# Altium PCB main.PcbDoc
Units mm, origin at the board's own origin, x right, y up, seen from the top; angles counter-clockwise.
Board outline 27 x 41 mm, 2 copper layers (Top Layer, Bottom Layer); 11 components, 13 nets, 65 pads, 445 vias.
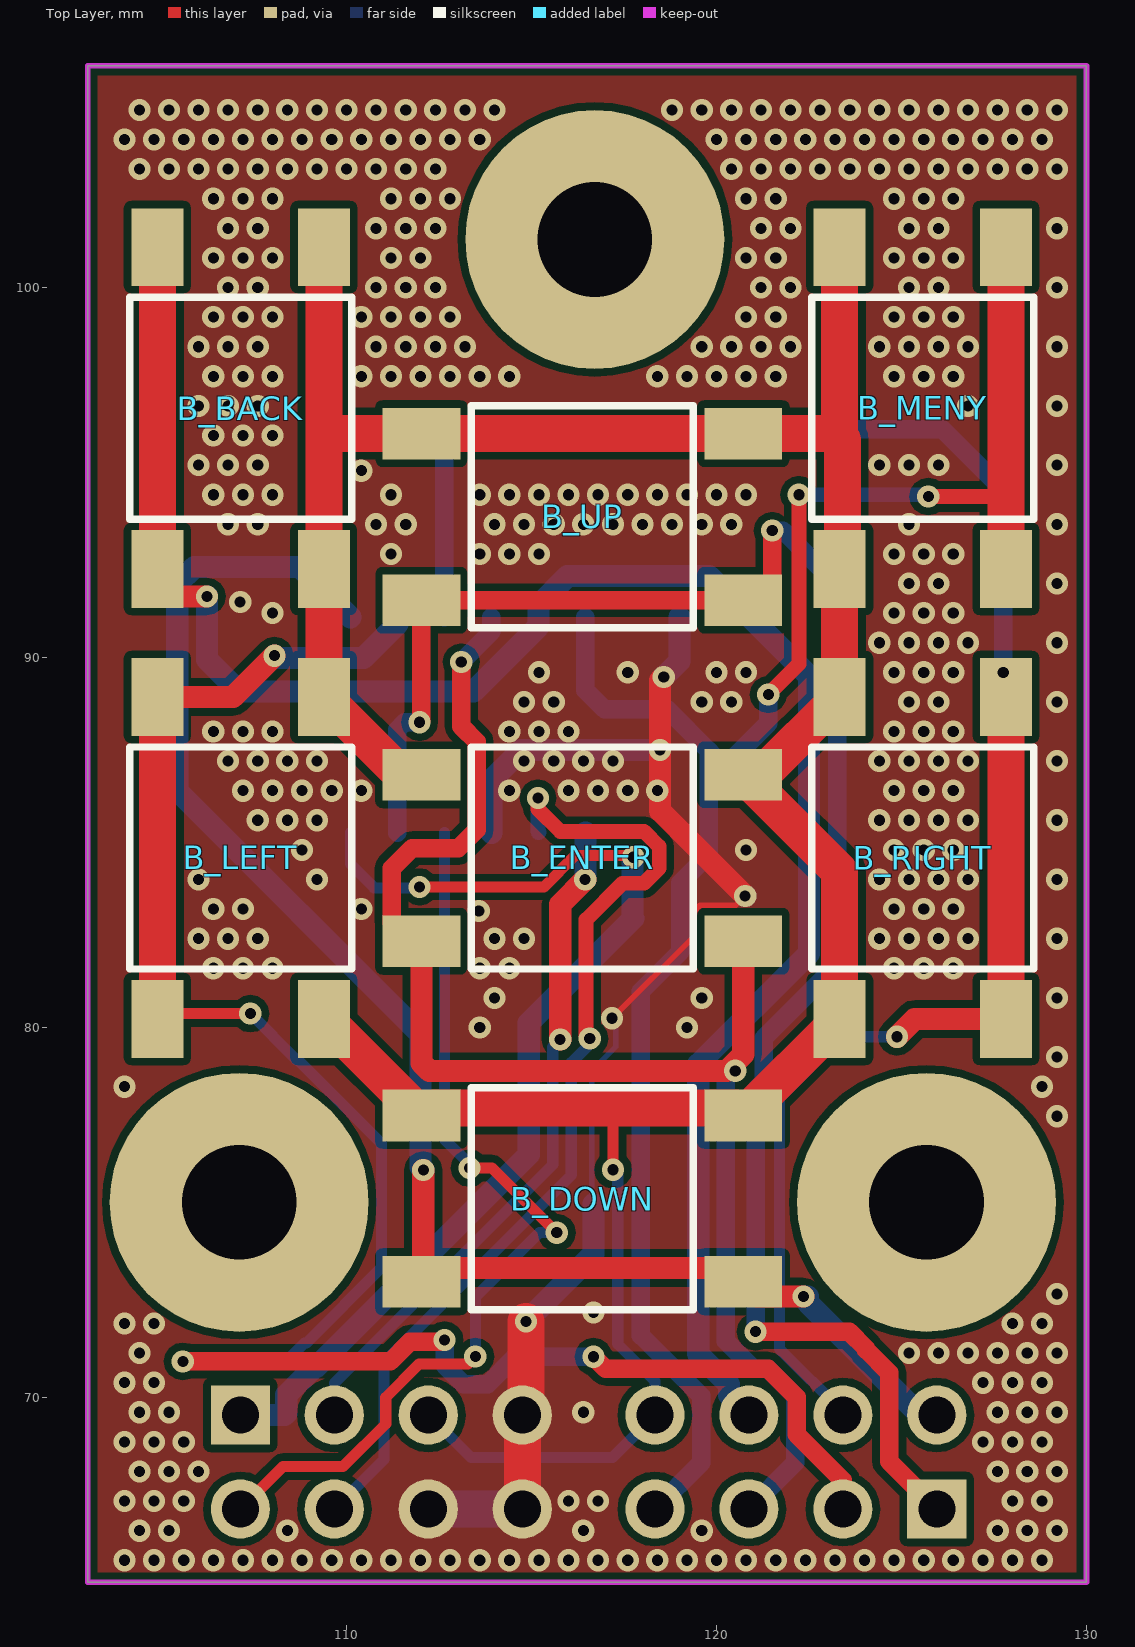
[diagram p0: Top Layer view]
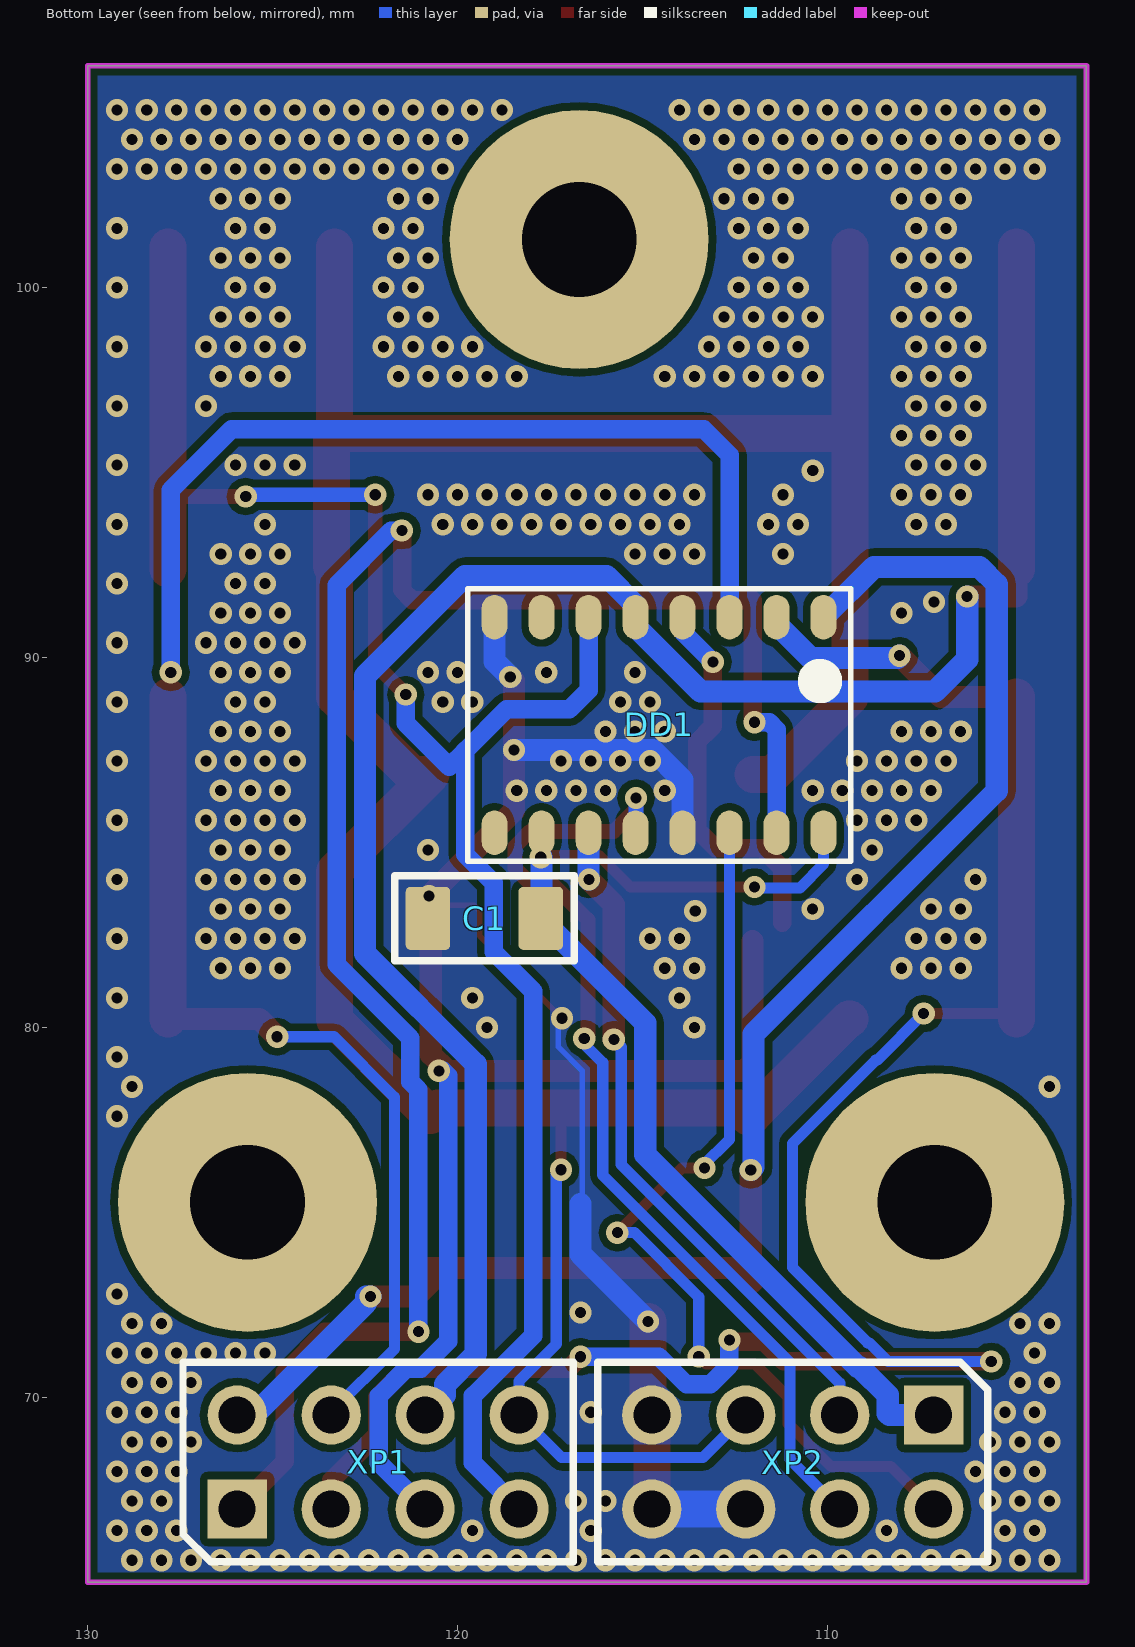
[diagram p1: Bottom Layer view, seen from below]
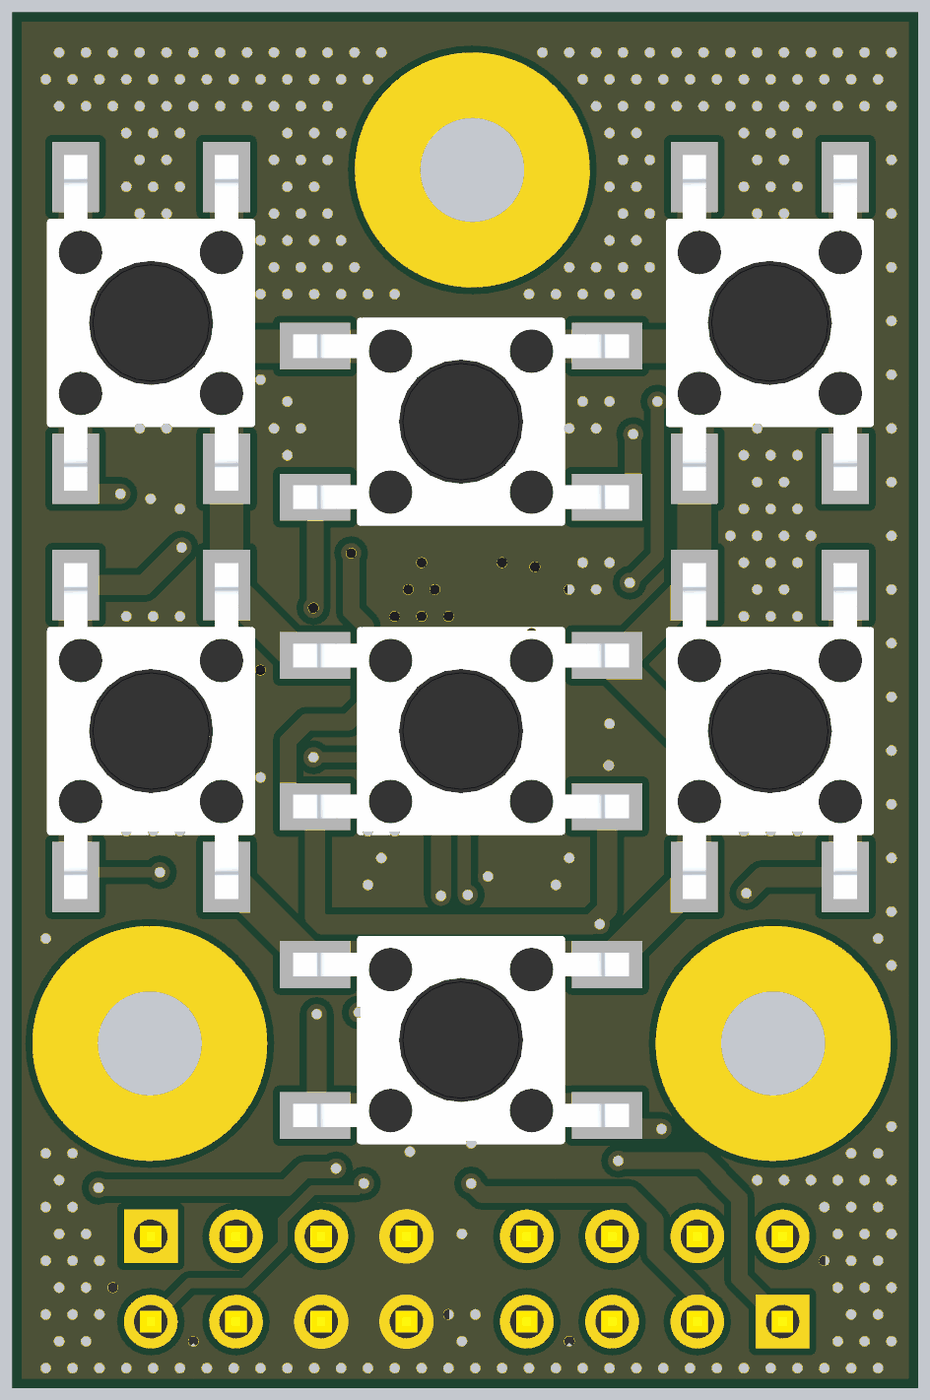
[diagram p2: 3D render of the assembled board from above, using the file's embedded part models]
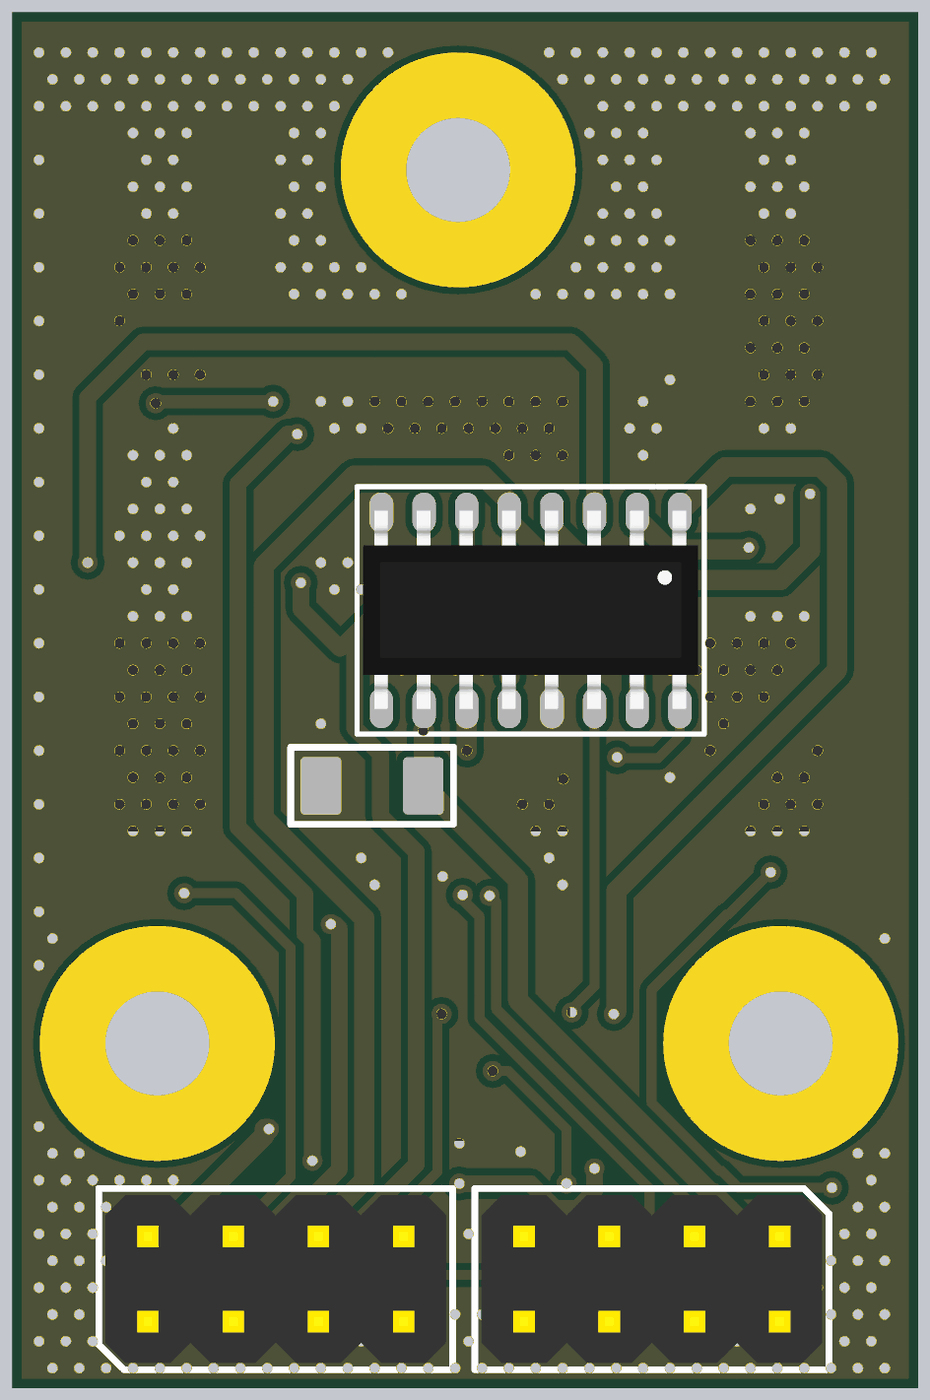
[diagram p3: 3D render of the assembled board from below, using the file's embedded part models]

## Layer stack, top to bottom
Top Solder: solder mask 0.0102, Solder Resist, Dk 3.5
Top Layer: signal copper 0.0356
Dielectric 1: dielectric 0.32, FR-4, Dk 4.8
Bottom Layer: signal copper 0.0356
Bottom Solder: solder mask 0.0102, Solder Resist, Dk 3.5

## Board outline
103,65 103,106 130,106 130,65

## Design rules (kind name [scope] priority, off if disabled: settings)
Clearance [All] p1: gap=0.2
PlaneConnect [All] p1: planeconnectstyle=Direct reliefexpansion=0.15 reliefentries=4 reliefconductorwidth=0.15 reliefairgap=0.15
PolygonConnect [All] p1: connectstyle=Direct reliefconductorwidth=0.15 reliefentries=4 polygonreliefangle="90 Angle" airgapwidth=0.15
RoutingVias [All] p1: holewidth=0.3 width=0.6 viastyle="Through Hole" minholewidth=0.3 minwidth=0.6 maxholewidth=0.3 maxwidth=0.6
SolderMaskExpansion [All] p1: expansion=0.008
Width [All] p1: maxlimit=1 minlimit=0.15 preferedwidth=0.3
29 further rules are at their usual default settings.

## Classes and differential pairs
component class main: B_BACK B_DOWN B_ENTER B_LEFT B_MENY B_RIGHT B_UP C1 DD1

## Components (designator, comment, footprint, x,y, rotation, side; value= is the part's Value field where it differs from the comment)
B_BACK "Tact_switch" Tact_switch_6x6x5 107.138,96.742 r90 top
B_DOWN "Tact_switch" Tact_switch_6x6x5 116.375,75.375 r180 top
B_ENTER "Tact_switch" Tact_switch_6x6x5 116.375,84.582 r180 top
B_LEFT "Tact_switch" Tact_switch_6x6x5 107.138,84.582 r90 top
B_MENY "Tact_switch" Tact_switch_6x6x5 125.576,96.742 r270 top
B_RIGHT "Tact_switch" Tact_switch_6x6x5 125.576,84.582 r270 top
B_UP "Tact_switch" Tact_switch_6x6x5 116.375,93.8 r180 top
C1 "/Укажите код маркировки/" C_1206_Manual_mount 119.25,82.95 r0 bottom
DD1 "74HC595N" SO16 114.552,88.164 r270 bottom
XP1 "PLD-8" PLD-8 122.145,68.255 r180 bottom
XP2 "PLD-8" PLD-8 110.94,68.255 r0 bottom

## Footprints (in the part's own frame and the unit in brackets; to place one, negate y for a bottom-side part, rotate by r counter-clockwise, add the part's x,y. Pads: shape width x height; smd on the part's side, far side on the other; paste and mask are expansions set on the pad)
C_1206_Manual_mount [mm] "SMD 1206"
  rrect20% 1.2x1.7 smd: 1(-1.5,0) 2(1.55,0)
  silkscreen extent -2.4,-1.15 2.45,1.15, body extent -1.55,-0.8 1.55,0.8, height 1.5
PLD-8 [mm]
  rect 1.6x1.6 hole 1: 1(-3.81,-1.27)
  round 1.6 hole 1: 2(-3.81,1.27) 3(-1.27,-1.27) 4(-1.27,1.27) 5(1.27,-1.27) 6(1.27,1.27) 7(3.81,-1.27) 8(3.81,1.27)
  silkscreen extent -5.28,-2.7 5.28,2.7, body extent -5.08,-2.5 5.08,2.5, height 8.5
SO16 [mm]
  oval 1.2x0.7 smd: 1(-2.925,4.445) 2(-2.925,3.175) 3(-2.925,1.905) 4(-2.925,0.635) 5(-2.925,-0.635) 6(-2.925,-1.905) 7(-2.925,-3.175) 8(-2.925,-4.445) 9(2.9,-4.445) 10(2.9,-3.175) 11(2.9,-1.905) 12(2.9,-0.635) 13(2.9,0.635) 14(2.9,1.905) 15(2.9,3.175) 16(2.9,4.445)
  silkscreen extent -3.7,-5.18 3.67,5.18, body extent -2.98,-4.99 2.93,4.99, height 1.45
Tact_switch_6x6x5 [mm] "Tact switch"
  rect 2.1x1.4 smd: 1(-4.35,2.25) 1(4.35,2.25) 2(-4.35,-2.25) 2(4.35,-2.25)
  silkscreen extent -3,-3 3,3, body extent -5,-3 5,3, height 5

## Part data
B_BACK B_DOWN B_ENTER B_LEFT B_MENY B_RIGHT B_UP: "SMD pushbutton"
C1: library part "Capacitor 1206", "SMD Capacitor 1206"
XP1 XP2: "PLD connector"

## Free pads (board coordinates)
  round 7 hole 3.1: 1(116.711,101.3) 2(107.1,75.275) 3(125.675,75.275)

## Via types
v1: diameter 0.6, hole 0.3, Top Layer to Bottom Layer, tented both sides, 445 vias

## Nets (pads, with @x,y where several pads share a name; then routed paths per layer and width w, separated by ;. In a path a pad name is that pad's centre, name@x,y a point inside that pad or via, vN(x,y) a via of type N, cw(c..) or ccw(c..) an arc to the next point about the centre after c; other vN are vias at no path point)
BACK: B_BACK.1 DD1.5 XP1.6 | length 53.6
  Top Layer w0.6: B_BACK.1@104.888,92.392 104.888,91.662 104.9,91.65 v1(106.225,91.65)
  Top Layer w1: B_BACK.1@104.888,92.392 B_BACK.1@104.888,101.092
  Bottom Layer w0.6: v1(106.225,91.65) 106.225,89.95 107.094,89.081 113.431,89.081 115.187,90.836 DD1.5 115.187,91.412 115.975,92.2 119.8,92.2 122.5,89.5 122.5,81.999 119.506,79.005 119.506,71.183 120.335,70.353 120.335,70.065 XP1.6
CLK: DD1.11 XP2.3 | length 18.6
  Top Layer w0.6: v1(115.775,79.675) 115.775,83.325 v1(116.45,84)
  Bottom Layer w0.3: XP2.3 109.67,70.395 115.575,76.3 115.575,79.475 v1(115.775,79.675)
  Bottom Layer w0.6: v1(116.45,84) 116.457,84.007 DD1.11
DOWN: B_DOWN.1 DD1.1 XP1.2 | length 42.6
  Top Layer w0.6: B_DOWN.1@112.025,73.125 112.075,73.175 B_DOWN.1@112.075,73.5 ; v1(112.075,76.15) B_DOWN.1@112.075,73.5 ; B_DOWN.1@120.725,73.125 121.125,72.725 v1(122.35,72.725) ; B_DOWN.1@120.775,73.5 B_DOWN.1@112.075,73.5
  Bottom Layer w0.6: DD1.1 108.746,92.45 105.894,92.45 105.425,91.981 105.425,86.4 111.997,79.828 111.997,76.228 v1(112.075,76.15) ; v1(122.35,72.725) 122.475,72.725 122.475,72.55 125.5,69.525 XP1.2
ENTER: B_ENTER.1 DD1.4 XP1.5 | length 39.3
  Top Layer w0.5: B_ENTER.1@111.225,82.825 111.225,84.3 111.775,84.85 113.025,84.85 113.525,85.35 113.525,87.718 113.1,88.143 v1(113.1,89.881)
  Top Layer w0.6: B_ENTER.1@112.025,82.332 112.025,79.039 112.239,78.825 120.275,78.825 120.725,79.275 B_ENTER.1@120.725,82.332
  Bottom Layer w0.5: v1(113.1,89.881) 113.917,90.698 DD1.4 ; v1(120.506,78.829) 120.39,78.829 120.256,78.694 120.256,71.518 120.999,70.775 121.393,70.775 122.125,70.043 122.125,68.235 XP1.5
GND: C1.2 DD1.8 DD1.13 XP2.6 XP2.7 XP2.8 | length 37.3
  Top Layer w0.15: v1(117.175,80.25) 119.4,82.475 119.4,83.146 119.561,83.307 120.525,83.307 v1(120.775,83.557)
  Top Layer w0.6: v1(118.575,89.475) 118.475,89.375 v1(118.475,87.5) 118.475,85.857 v1(120.775,83.557)
  Top Layer w1: XP2.8 XP2.7 114.875,69.65 114.85,69.675 v1(114.85,72.05)
  Bottom Layer w0.15: 116.675,75.225 116.631,75.269 116.631,78.831 117.275,79.475 117.275,80.15 v1(117.175,80.25)
  Bottom Layer w0.6: DD1.13 113.917,86.692 114.725,87.5 115.6,87.5 v1(118.475,87.5) ; v1(114.85,72.05) 116.675,73.875 116.675,75.225 ; v1(118.575,89.475) 118.997,89.897 DD1.8
  Bottom Layer w1: XP2.6 XP2.8
  other v1: 104,65.6 104.8,65.6 105.6,65.6 106.4,65.6 107.2,65.6 108,65.6 108.8,65.6 109.6,65.6 110.4,65.6 111.2,65.6 112,65.6 112.8,65.6 113.6,65.6 114.4,65.6 115.2,65.6 116,65.6 116.8,65.6 117.6,65.6 118.4,65.6 119.2,65.6 120,65.6 120.8,65.6 121.6,65.6 122.4,65.6 123.2,65.6 124,65.6 124.8,65.6 125.6,65.6 126.4,65.6 127.2,65.6 128,65.6 128.8,65.6 104.4,66.4 105.2,66.4 108.4,66.4 116.4,66.4 119.6,66.4 127.6,66.4 128.4,66.4 129.2,66.4 104,67.2 104.8,67.2 105.6,67.2 116,67.2 116.8,67.2 128,67.2 128.8,67.2 104.4,68 105.2,68 106,68 127.6,68 128.4,68 129.2,68 104,68.8 104.8,68.8 105.6,68.8 127.2,68.8 128,68.8 128.8,68.8 104.4,69.6 105.2,69.6 116.4,69.6 127.6,69.6 128.4,69.6 129.2,69.6 104,70.4 104.8,70.4 127.2,70.4 128,70.4 128.8,70.4 104.4,71.2 125.2,71.2 126,71.2 126.8,71.2 127.6,71.2 128.4,71.2 129.2,71.2 104,72 104.8,72 128,72 128.8,72 116.675,72.3 129.2,72.8 129.2,77.6 104,78.4 128.8,78.4 129.2,79.2 113.6,80 119.2,80 114,80.8 119.6,80.8 129.2,80.8 106.4,81.6 107.2,81.6 108,81.6 113.6,81.6 114.4,81.6 124.8,81.6 125.6,81.6 126.4,81.6 106,82.4 106.8,82.4 107.6,82.4 114,82.4 114.8,82.4 124.4,82.4 125.2,82.4 126,82.4 126.8,82.4 129.2,82.4 113.575,83.15 106.4,83.2 107.2,83.2 110.4,83.2 124.8,83.2 125.6,83.2 126.4,83.2 106,84 109.2,84 124.4,84 125.2,84 126,84 126.8,84 129.2,84 108.8,84.8 120.8,84.8 124.8,84.8 125.6,84.8 126.4,84.8 107.6,85.6 108.4,85.6 109.2,85.6 124.4,85.6 125.2,85.6 126,85.6 126.8,85.6 129.2,85.6 107.2,86.4 108,86.4 108.8,86.4 109.6,86.4 110.4,86.4 114.4,86.4 116,86.4 116.8,86.4 117.6,86.4 118.4,86.4 124.8,86.4 125.6,86.4 126.4,86.4 106.8,87.2 107.6,87.2 108.4,87.2 109.2,87.2 114.8,87.2 115.6,87.2 116.4,87.2 117.2,87.2 124.4,87.2 125.2,87.2 126,87.2 126.8,87.2 129.2,87.2 106.4,88 107.2,88 108,88 114.4,88 115.2,88 116,88 124.8,88 125.6,88 126.4,88 114.8,88.8 115.6,88.8 119.6,88.8 120.4,88.8 125.2,88.8 126,88.8 129.2,88.8 115.2,89.6 117.6,89.6 120,89.6 120.8,89.6 124.8,89.6 125.6,89.6 126.4,89.6 124.4,90.4 125.2,90.4 126,90.4 126.8,90.4 129.2,90.4 108,91.2 124.8,91.2 125.6,91.2 126.4,91.2 107.125,91.5 125.2,92 126,92 129.2,92 111.2,92.8 113.6,92.8 114.4,92.8 115.2,92.8 124.8,92.8 125.6,92.8 126.4,92.8 106.8,93.6 107.6,93.6 110.8,93.6 111.6,93.6 114,93.6 114.8,93.6 115.6,93.6 116.4,93.6 117.2,93.6 118,93.6 118.8,93.6 119.6,93.6 120.4,93.6 125.2,93.6 129.2,93.6 106.4,94.4 107.2,94.4 108,94.4 111.2,94.4 113.6,94.4 114.4,94.4 115.2,94.4 116,94.4 116.8,94.4 117.6,94.4 118.4,94.4 119.2,94.4 120,94.4 120.8,94.4 110.4,95.05 106,95.2 106.8,95.2 107.6,95.2 124.4,95.2 125.2,95.2 126,95.2 129.2,95.2 106.4,96 107.2,96 108,96 106,96.8 106.8,96.8 107.6,96.8 126.8,96.8 129.2,96.8 106.4,97.6 107.2,97.6 108,97.6 110.4,97.6 111.2,97.6 112,97.6 112.8,97.6 113.6,97.6 114.4,97.6 118.4,97.6 119.2,97.6 120,97.6 120.8,97.6 121.6,97.6 124.8,97.6 125.6,97.6 126.4,97.6 106,98.4 106.8,98.4 107.6,98.4 110.8,98.4 111.6,98.4 112.4,98.4 113.2,98.4 119.6,98.4 120.4,98.4 121.2,98.4 122,98.4 124.4,98.4 125.2,98.4 126,98.4 126.8,98.4 129.2,98.4 106.4,99.2 107.2,99.2 108,99.2 110.4,99.2 111.2,99.2 112,99.2 112.8,99.2 120.8,99.2 121.6,99.2 124.8,99.2 125.6,99.2 126.4,99.2 106.8,100 107.6,100 110.8,100 111.6,100 112.4,100 121.2,100 122,100 125.2,100 126,100 129.2,100 106.4,100.8 107.2,100.8 108,100.8 111.2,100.8 112,100.8 120.8,100.8 121.6,100.8 124.8,100.8 125.6,100.8 126.4,100.8 106.8,101.6 107.6,101.6 110.8,101.6 111.6,101.6 112.4,101.6 121.2,101.6 122,101.6 125.2,101.6 126,101.6 129.2,101.6 106.4,102.4 107.2,102.4 108,102.4 111.2,102.4 112,102.4 112.8,102.4 120.8,102.4 121.6,102.4 124.8,102.4 125.6,102.4 126.4,102.4 104.4,103.2 105.2,103.2 106,103.2 106.8,103.2 107.6,103.2 108.4,103.2 109.2,103.2 110,103.2 110.8,103.2 111.6,103.2 112.4,103.2 120.4,103.2 121.2,103.2 122,103.2 122.8,103.2 123.6,103.2 124.4,103.2 125.2,103.2 126,103.2 126.8,103.2 127.6,103.2 128.4,103.2 129.2,103.2 104,104 104.8,104 105.6,104 106.4,104 107.2,104 108,104 108.8,104 109.6,104 110.4,104 111.2,104 112,104 112.8,104 113.6,104 120,104 120.8,104 121.6,104 122.4,104 123.2,104 124,104 124.8,104 125.6,104 126.4,104 127.2,104 128,104 128.8,104 104.4,104.8 105.2,104.8 106,104.8 106.8,104.8 107.6,104.8 108.4,104.8 109.2,104.8 110,104.8 110.8,104.8 111.6,104.8 112.4,104.8 113.2,104.8 114,104.8 118.8,104.8 119.6,104.8 120.4,104.8 121.2,104.8 122,104.8 122.8,104.8 123.6,104.8 124.4,104.8 125.2,104.8 126,104.8 126.8,104.8 127.6,104.8 128.4,104.8 129.2,104.8
LEFT: B_LEFT.1 DD1.2 XP1.3 | length 55.6
  Top Layer w0.3: B_LEFT.1@104.888,80.232 105.031,80.375 v1(107.4,80.375)
  Top Layer w0.5: v1(105.575,70.975) 111.185,70.975 111.71,71.5 112.6,71.5 v1(112.65,71.55) ; v1(116.675,71.1) 117,70.775 121.393,70.775 122.165,70.003 122.165,69.007 123.415,67.757 XP1.3
  Top Layer w0.6: B_LEFT.1@104.888,88.932 106.932,88.932 v1(108.05,90.05)
  Top Layer w1: B_LEFT.1@104.888,80.232 B_LEFT.1@104.888,88.932
  Bottom Layer w0.3: v1(105.575,70.975) 108.362,70.975 108.862,71.475 108.912,71.475 110.95,73.513 110.95,76.87 108.695,79.125 108.65,79.125 v1(107.4,80.375)
  Bottom Layer w0.5: v1(112.65,71.55) 112.65,70.873 113.17,70.353 113.811,70.353 114.557,71.1 v1(116.675,71.1)
  Bottom Layer w0.6: v1(108.05,90.05) 108.111,89.989 110.459,89.989 111.377,90.907 DD1.2
MENY: B_MENY.1 DD1.6 XP1.7 | length 51.6
  Top Layer w0.4: v1(121.4,89) 122.226,89.826 v1(122.225,94.4) v1(122.225,94.4) ; v1(125.725,94.35) 127.776,94.35 127.826,94.4
  Top Layer w1: B_MENY.1@127.826,92.392 127.826,94.4 B_MENY.1@127.826,101.092
  Bottom Layer w0.4: v1(122.225,94.4) 125.675,94.4 v1(125.725,94.35)
  Bottom Layer w0.5: DD1.6 116.457,89.118 116.975,88.6 118.675,88.6 119.8,87.475 ; XP1.7 119.585,68.235 119.585,70.043 117.956,71.672 117.956,80.981 119.025,82.05 119.025,83.911 119.797,84.683 119.797,87.472 119.8,87.475 ; v1(121.4,89) 121.4,88.225 120.225,87.05 119.8,87.475
OUT: B_BACK.2 B_DOWN.2 B_ENTER.2 B_LEFT.2 B_MENY.2 B_RIGHT.2 B_UP.2 XP1.8 XP2.5 | length 84.8
  Top Layer w0.3: v1(117.206,76.154) 117.206,77.435
  Top Layer w1: B_LEFT.2@109.388,80.232 109.418,80.232 112.025,77.625 112.054,77.654 112.133,77.575 112.383,77.825 120.525,77.825 120.725,77.625 120.739,77.625 123.326,80.212 123.326,80.232 123.326,84.22 120.714,86.832 120.725,86.832 121.226,86.832 123.326,88.932 123.326,92.392 123.4,92.466 123.4,95.876 123.326,95.95 ; B_BACK.2@109.388,101.092 109.388,96.05 ; B_ENTER.2@112.014,86.832 111.488,86.832 109.388,88.932 109.388,92.392 109.388,96.05 ; B_MENY.2@123.326,101.092 123.326,95.95 ; 109.388,96.05 112.025,96.05 120.725,96.05 123.226,96.05 123.326,95.95
  Bottom Layer w0.3: XP2.5 113.36,68.375 117.185,68.375 XP1.8 118.335,70.444 117.331,71.449 117.331,76.029 v1(117.206,76.154)
RIGHT: B_RIGHT.1 DD1.3 XP1.4 | length 50.4
  Top Layer w0.6: v1(124.875,79.75) 125.357,80.232 B_RIGHT.1@127.826,80.232
  Top Layer w1: B_RIGHT.1@127.826,80.232 B_RIGHT.1@127.826,88.932
  Bottom Layer w0.3: XP1.4 123.415,69.601 121.706,71.31 121.706,72.048 121.7,72.054 121.7,78.114 123.336,79.75 v1(124.875,79.75)
  Bottom Layer w0.5: DD1.3 112.647,95.472 113.35,96.175 126.1,96.175 127.75,94.525 v1(127.75,89.6)
ST_REG: DD1.12 XP2.4 | length 26.9
  Top Layer w0.4: v1(115.175,86.2) 115.175,85.9 115.775,85.3 118.04,85.3 118.45,84.89 118.45,84.31 118.04,83.9 117.46,83.9 116.475,82.915 116.475,79.8 v1(116.575,79.7)
  Bottom Layer w0.3: XP2.4 111.01,68.325 111.01,70.95 116.075,76.015 116.075,79.056 116.575,79.556 v1(116.575,79.7)
  Bottom Layer w0.4: v1(115.175,86.2) 115.175,85.302 115.2,85.277 DD1.12
TX: DD1.14 XP2.2 | length 25.5
  Top Layer w0.3: XP2.2 108.28,68.135 109.906,68.135 111.06,69.289 111.06,70.001 111.959,70.9 113.277,70.9 v1(113.481,71.103) ; v1(113.325,76.2) 113.934,76.2 v1(115.681,74.454)
  Bottom Layer w0.3: DD1.14 112.647,76.978 113.375,76.25 v1(113.325,76.2) ; v1(113.481,71.103) 113.481,72.713 115.221,74.454 v1(115.681,74.454)
UP: B_UP.1 DD1.15 XP1.1 | length 49.8
  Top Layer w0.5: v1(111.975,88.25) 112.025,88.3 112.025,91.55 120.725,91.55 121.225,91.55 121.5,91.825 121.5,93.424 v1(121.506,93.43) ; v1(121.056,71.779) 123.585,71.779 124.039,71.325 124.039,71.295 124.665,70.669 124.665,68.275 XP1.1
  Bottom Layer w0.5: DD1.15 111.377,88.052 111.575,88.25 v1(111.975,88.25) ; v1(121.056,71.779) 121.056,78.318 121.275,78.537 121.275,79.713 123.269,81.708 123.269,91.956 121.795,93.43 v1(121.506,93.43)
VCC: C1.1 DD1.10 DD1.16 XP2.1 | length 29.4
  Top Layer w0.3: v1(111.975,83.8) 115.331,83.8 116.181,84.65 117.7,84.65 v1(117.75,84.6)
  Bottom Layer w0.3: DD1.16 110.107,84.418 110.75,83.775 111.95,83.775 v1(111.975,83.8)
  Bottom Layer w0.6: XP2.1 108.325,69.525 108.37,69.57 108.37,70.063 109.132,70.825 109.181,70.825 114.925,76.569 114.925,80.125 C1.1 117.727,82.973 v1@117.727,84.6
pads on no net: DD1.7 DD1.9

## Polygon pours and split planes (outlines as drawn)
GND on Top Layer "GND_L01_P000" (solid, remove dead copper, pour order 0): 103,65 130,65 130,106 103,106
GND on Bottom Layer "GND_L02_P002" (solid, remove dead copper, pour order 2): 130,65 103,65 103,106 130,106

## Keep-outs
Keep-Out Layer:
  the board outline again, w0.15

## Silkscreen, mask and mechanical layers (free items; w line width, h text height)
Mechanical 2:
  lines w2: 115.5,65 103,65 103,106 115.5,106 ; 118,65 130,65 130,106 118,106